# Altium PCB Review_2510_RegulationChauffage_Daugtherboard.PcbDoc
Units mm, origin at the board's own origin, x right, y up, seen from the top; angles counter-clockwise.
Board outline 100 x 60 mm, 2 copper layers (Top Layer, Bottom Layer), stack 1.586 mm thick; 59 components, 63 nets, 287 pads, 98 vias.
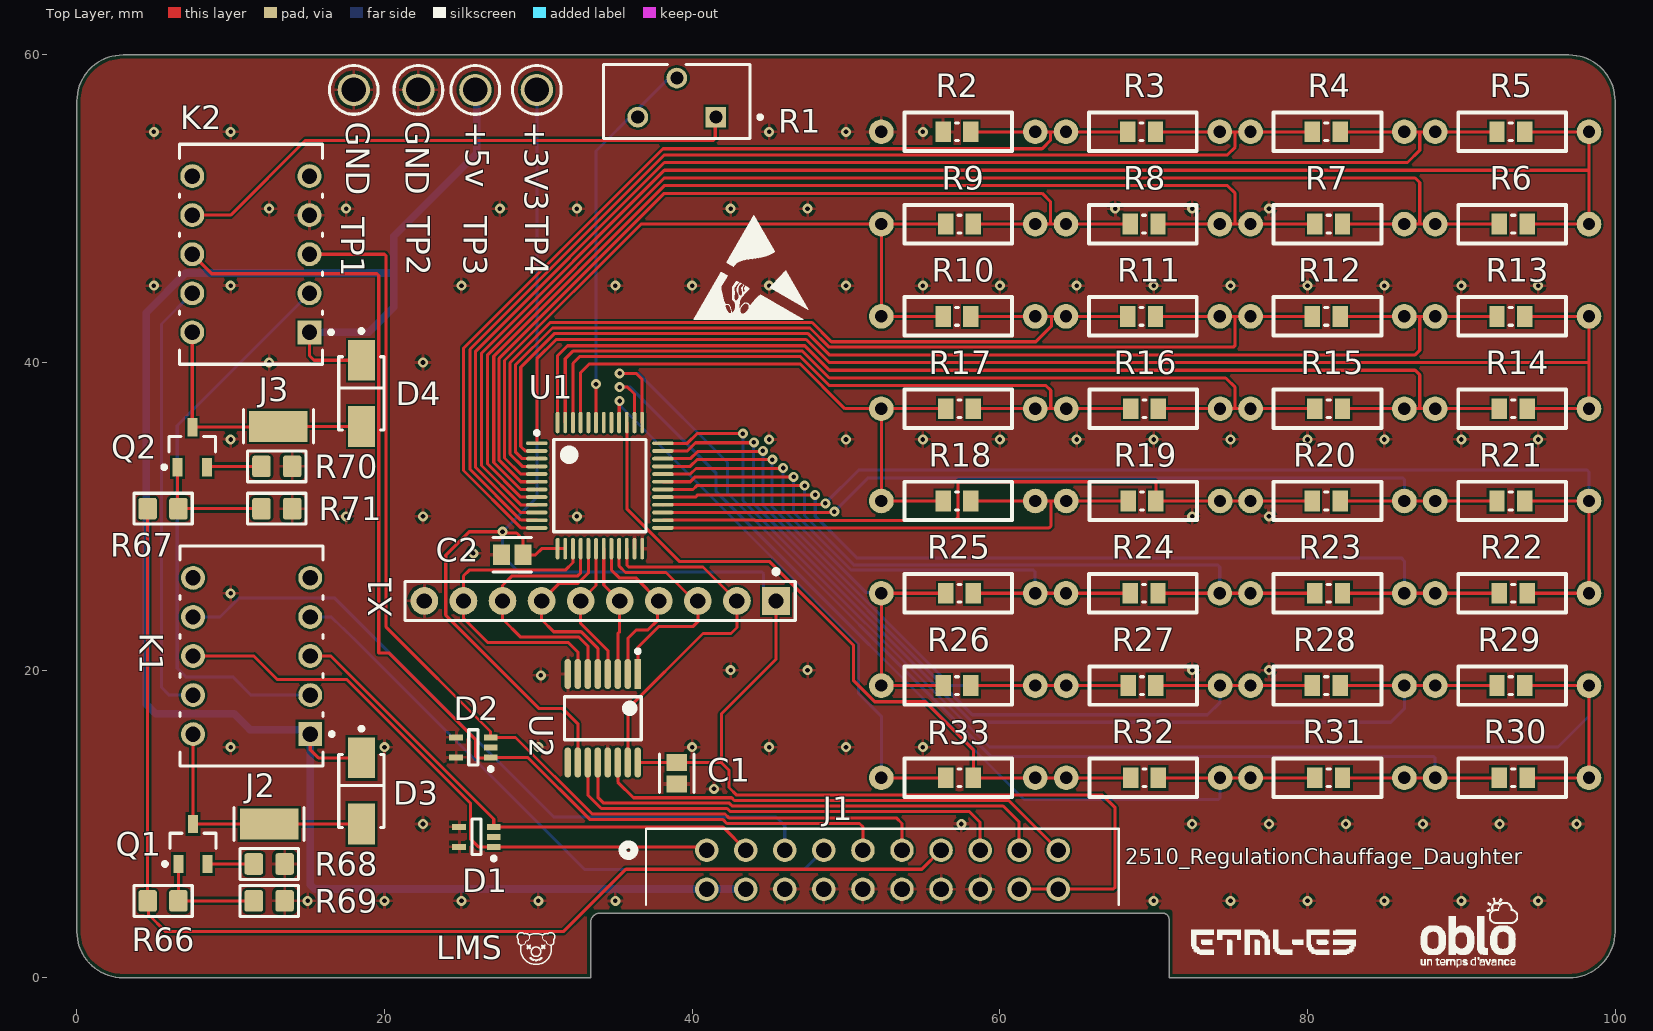
[diagram p0: Top Layer view]
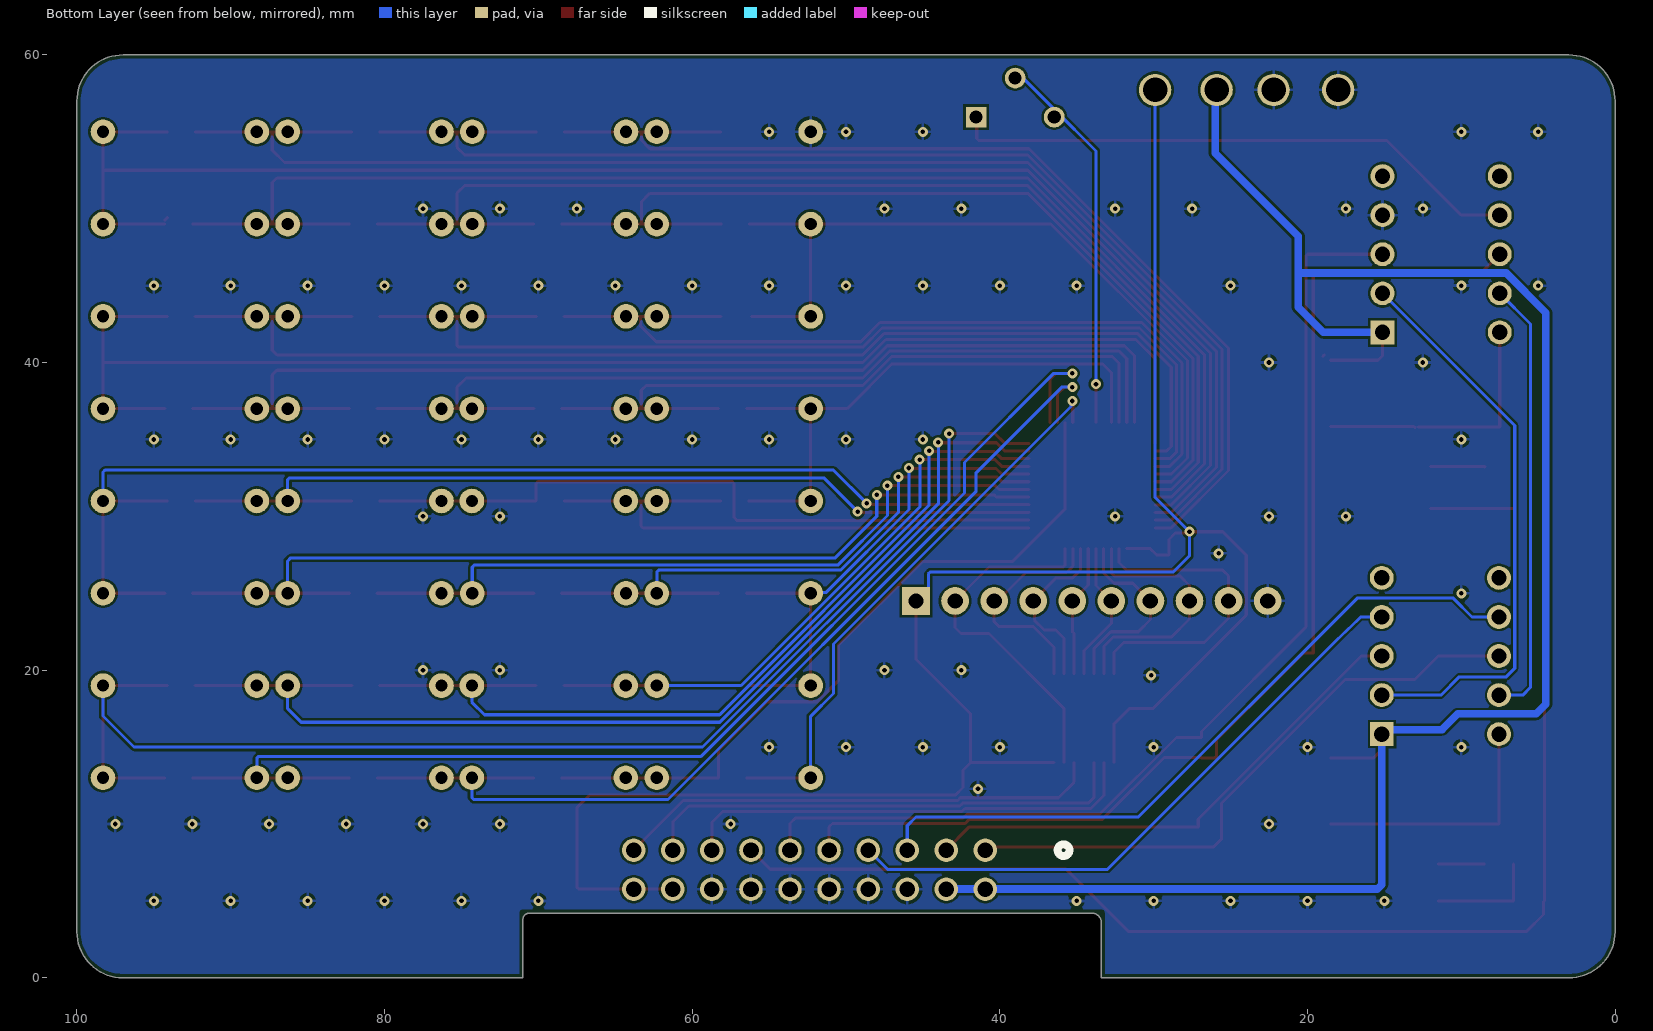
[diagram p1: Bottom Layer view, seen from below]

## Layer stack, top to bottom
Top Solder: solder mask 0.0102, Solder Resist, Dk 3.5
Top Layer: signal copper 0.018
Dielectric1: core 1.55, FR-4, Dk 4.8
Bottom Layer: signal copper 0.018
Bottom Solder: solder mask 0.0102, Solder Resist, Dk 3.5

## Board outline
3,0 cw(c3,3) 0,3 0,57 cw(c3,57) 3,60 97,60 cw(c97,57) 100,57 100,3 cw(c97,3) 97,0 71,0 71,3.8 ccw(c70.6,3.8) 70.6,4.2 34,4.2 ccw(c34,3.6) 33.4,3.6 33.4,0

## Design rules (kind name [scope] priority, off if disabled: settings)
BoardOutlineClearance [All] p1: gap=0.25 ignorepadtopadclearanceinfootprint=FALSE except(0: Arc-SplitContinuation Track-SplitContinuation SMDPad-SplitContinuation THPad-SplitContinuation Via-SplitContinuation Fill-SplitContinuation Poly-SplitContinuation Region-SplitContinuation Text-SplitContinuation)
Clearance Clearance-xPP-xTP-xTT [All] p1: gap=0.151 ignorepadtopadclearanceinfootprint=FALSE
ComponentClearance [All] p1: gap=0.25 collisioncheckmode=3 verticalgap=0.25 showdistances=FALSE
DiffPairsRouting [All] p1: maxlimit=0.25 minlimit=0.25 mostfreqgap=0.25 toplayer_minwidth=0.381 toplayer_maxwidth=0.381 toplayer_prefwidth=0.381 bottomlayer_minwidth=0.381 bottomlayer_maxwidth=0.381 bottomlayer_prefwidth=0.381 maxuncoupledlength=12.5
Height [All] p1: minheight=0 maxheight=25 prefheight=12.5
HoleSize HoleSize-PTH [All] p1: absolutevalues=TRUE maxlimit=10 minlimit=0.25 maxpercent=80.000 minpercent=20.000
HoleToHoleClearance [All] p1: gap=0.35 allowstackedmicrovias=TRUE
MinimumAnnularRing "Minimum IAR  >0.45mm" [((ObjectKind = 'Pad') OR (ObjectKind = 'Via')) And (Layer = 'MultiLayer') And (HoleDiameter > AsMM(0.45))] p1: minimumring=0.175 // minimum inner annular ring for pads > 0.45mm finished hole size
MinimumAnnularRing "Minimum IAR <=0.45mm" [((ObjectKind = 'Pad') OR (ObjectKind = 'Via')) And (Layer = 'MultiLayer') And (HoleDiameter <= AsMM(0.45))] p2: minimumring=0.175 // minimum inner annular ring for pads <= 0.45mm finished hole size
MinimumSolderMaskSliver [All] p1: minsoldermaskwidth=0.08
PasteMaskExpansion [All] p1: expansion=-0.025
PlaneClearance PlaneClearance-IPI [All] p1: clearance=0.25
PlaneConnect [All] p1: planeconnectstyle=Relief reliefexpansion=0.175 reliefentries=4 reliefconductorwidth=0.2 reliefairgap=0.2
PolygonConnect PolygonConnect-xTW [All] p1: connectstyle=Relief reliefconductorwidth=0.2 reliefentries=4 polygonreliefangle="90 Angle" airgapwidth=0.2
RoutingCorners [All] p1: cornerstyle=45-Degree minsetback=2.5 maxsetback=2.5
RoutingVias RoutingViasES [All] p1: holewidth=0.3 width=0.65 viastyle="Through Hole" minholewidth=0.25 minwidth=0.61 maxholewidth=0.45 maxwidth=0.8 // finishet hole size <= 0.45mm
SilkToSilkClearance [All] p1: silktosilkclearance=0.2
SilkToSolderMaskClearance SilkscreenOverComponentPads [IsPad] p1: minsilkscreentomaskgap=0.2 clearancetoexposedcopper=TRUE
SolderMaskExpansion [All] p1: expansion=0 istentingtop=FALSE
SupplyNets "Schematic Supply Nets_2" [InNet('GND')] p1: voltage=0.000
SupplyNets "Schematic Supply Nets_1" [InNet('+3V3')] p2: voltage=0.000
SupplyNets "Schematic Supply Nets" [InNet('+5V')] p3: voltage=0.000
UnRoutedNet [All] p1: checkbadconnections=TRUE
Width Width-xTW [All] p1: maxlimit=1.5 minlimit=0.15 preferedwidth=0.2
17 further rules are at their usual default settings.

## Components (designator, comment, footprint, x,y, rotation, side; value= is the part's Value field where it differs from the comment)
C1 "0.1 uF" FP-CC0805-0_85-IPC_C 39,13.299 r90 top
C2 "0.1 uF" FP-CC0805-0_85-IPC_C 28.299,27.5 r0 top
D1 "SP1002-02JTG" SOT65P220X110-5N 25.975,9.161 r180 top
D2 "SP1002-02JTG" SOT65P220X110-5N 25.775,14.977 r180 top
D3 "SS14" FP-403AE-MFG 18.5,12.15 r90 top
D4 "SS14" FP-403AE-MFG 18.5,38 r90 top
J1 "SFH11-PBPC-D10-RA-BK" CONN20_D10-RA-BK_SUL 40.94,8.3 r0 top
J2 "5019" FP-5019-MFG 12.5,10 r0 top
J3 "5019" FP-5019-MFG 13.1,35.85 r0 top
K1 "TQ2-5V-3" FP-TQ2-5V-3-MFG 11.36,20.92 r90 top
K2 "TQ2-5V-3" FP-TQ2-5V-3-MFG 11.31,47.04 r90 top
Q1 "IRLML2402" SOT95P237X112-3M 7.55,8.7 r90 top
Q2 "IRLML2402" SOT95P237X112-3M 7.5,34.5 r90 top
R1 "200R" BOUR-3386H 39,57.223 r180 top
R2 "820R" "THT SMD RESISTOR" 52.3,55 r0 top
R3 "6R2" "THT SMD RESISTOR" 64.3,55 r0 top
R4 "6R2" "THT SMD RESISTOR" 76.3,55 r0 top
R5 "6R8" "THT SMD RESISTOR" 88.3,55 r0 top
R6 "6R2" "THT SMD RESISTOR" 98.3,49 r180 top
R7 "6R8" "THT SMD RESISTOR" 86.3,49 r180 top
R8 "6R2" "THT SMD RESISTOR" 74.3,49 r180 top
R9 "6R8" "THT SMD RESISTOR" 62.3,49 r180 top
R10 "6R8" "THT SMD RESISTOR" 52.3,43 r0 top
R11 "6R2" "THT SMD RESISTOR" 64.3,43 r0 top
R12 "6R8" "THT SMD RESISTOR" 76.3,43 r0 top
R13 "6R8" "THT SMD RESISTOR" 88.3,43 r0 top
R14 "6R8" "THT SMD RESISTOR" 98.3,37 r180 top
R15 "6R2" "THT SMD RESISTOR" 86.3,37 r180 top
R16 "6R8" "THT SMD RESISTOR" 74.32,37 r180 top
R17 "6R8" "THT SMD RESISTOR" 62.3,37 r180 top
R18 "6R8" "THT SMD RESISTOR" 52.3,31 r0 top
R19 "6R8" "THT SMD RESISTOR" 64.32,31 r0 top
R20 "6R8" "THT SMD RESISTOR" 76.3,31 r0 top
R21 "6R8" "THT SMD RESISTOR" 88.3,31 r0 top
R22 "6R8" "THT SMD RESISTOR" 98.3,25 r180 top
R23 "6R8" "THT SMD RESISTOR" 86.3,25 r180 top
R24 "7R5" "THT SMD RESISTOR" 74.3,25 r180 top
R25 "6R8" "THT SMD RESISTOR" 62.3,25 r180 top
R26 "6R8" "THT SMD RESISTOR" 52.3,19 r0 top
R27 "6R8" "THT SMD RESISTOR" 64.32,19 r0 top
R28 "7R5" "THT SMD RESISTOR" 76.3,19 r0 top
R29 "6R8" "THT SMD RESISTOR" 88.3,19 r0 top
R30 "6R8" "THT SMD RESISTOR" 98.3,13 r180 top
R31 "7R5" "THT SMD RESISTOR" 86.3,13 r180 top
R32 "6R8" "THT SMD RESISTOR" 74.32,13 r180 top
R33 "7R5" "THT SMD RESISTOR" 62.3,13 r180 top
R66 "100R" RESC2012X06M 5.6,5 r0 top
R67 "100R" RESC2012X06M 5.6,30.5 r0 top
R68 "0R" RESC2012X06M 12.5,7.4 r180 top
R69 "100k" RESC2012X06M 12.5,5 r0 top
R70 "0R" RESC2012X06M 13,33.25 r180 top
R71 "100k" RESC2012X06M 13,30.5 r0 top
TP1 "5011" KSTN-5011_V 18,57.723 r180 top
TP2 "5011" KSTN-5011_V 22.2,57.723 r0 top
TP3 "5010" KSTN-5010_V 25.902,57.723 r0 top
TP4 "5010" KSTN-5010_V 29.9,57.723 r180 top
U1 "ADG732BSUZ-REEL" ADI-SU-48_L 34,32 r0 top
U2 "74HC595PW,118" FP-SOT403-1-IPC_A 34.19,16.875 r270 top
X1 "2.54" PIN-1X10-2.54 45.45,24.5 r180 top

## Footprints (in the part's own frame and the unit in brackets; to place one, negate y for a bottom-side part, rotate by r counter-clockwise, add the part's x,y. Pads: shape width x height; smd on the part's side, far side on the other; paste and mask are expansions set on the pad)
ADI-SU-48_L [mm] "QFP, 48-Leads, Body 7x7mm, Pitch 0.5mm, IPC High Density"
  oval 1.4x0.25 smd: 1(-4.1,2.75) 2(-4.1,2.25) 3(-4.1,1.75) 4(-4.1,1.25) 5(-4.1,0.75) 6(-4.1,0.25) 7(-4.1,-0.25) 8(-4.1,-0.75) 9(-4.1,-1.25) 10(-4.1,-1.75) 11(-4.1,-2.25) 12(-4.1,-2.75) 25(4.1,-2.75) 26(4.1,-2.25) 27(4.1,-1.75) 28(4.1,-1.25) 29(4.1,-0.75) 30(4.1,-0.25) 31(4.1,0.25) 32(4.1,0.75) 33(4.1,1.25) 34(4.1,1.75) 35(4.1,2.25) 36(4.1,2.75)
  oval 0.25x1.4 smd: 13(-2.75,-4.1) 14(-2.25,-4.1) 15(-1.75,-4.1) 16(-1.25,-4.1) 17(-0.75,-4.1) 18(-0.25,-4.1) 19(0.25,-4.1) 20(0.75,-4.1) 21(1.25,-4.1) 22(1.75,-4.1) 23(2.25,-4.1) 24(2.75,-4.1) 37(2.75,4.1) 38(2.25,4.1) 39(1.75,4.1) 40(1.25,4.1) 41(0.75,4.1) 42(0.25,4.1) 43(-0.25,4.1) 44(-0.75,4.1) 45(-1.25,4.1) 46(-1.75,4.1) 47(-2.25,4.1) 48(-2.75,4.1)
  silkscreen extent -4.22,-3 3,3.55, body extent -3.5,-3.5 3.5,3.5, height 1.2
BOUR-3386H [mm] "THD, 3-Leads, Body 9.53x4.83mm, Pitch 2.54mm"
  rect 1.35x1.35 hole 0.85: 1(-2.54,1.27)
  round 1.35 hole 0.85: 2(0,-1.27) 3(2.54,1.27)
  silkscreen extent -5.54,-2.16 4.76,2.67, body extent -4.79,-2.22 4.79,2.73, height 9.53
CONN20_D10-RA-BK_SUL [mil]
  round 60 hole 40 paste-99999 mask+0: 1(0,0) 2(0,-100) 3(100,0) 4(100,-100) 5(200,0) 6(200,-100) 7(300,0) 8(300,-100) 9(400,0) 10(400,-100) 11(500,0) 12(500,-100) 13(600,0) 14(600,-100) 15(700,0) 16(700,-100) 17(800,0) 18(800,-100) 19(900,0) 20(900,-100)
  silkscreen extent -215,-140 1055,55, body extent -150,-498 1044,8, height 281
FP-403AE-MFG [mm]
  rect 2.65x1.75 smd paste+0 mask+0: 1(-2.15,0) 2(2.15,0)
  silkscreen extent -2.37,-1.48 4.17,1.48, body extent -3.57,-1.58 3.57,1.58, height 0.25
FP-5019-MFG [mm]
  rect 3.8x2.03 smd paste+0 mask+0: 1(0,0)
  silkscreen extent -2.27,-1.08 2.27,1.08
FP-CC0805-0_85-IPC_C [mm]
  rect 1.105x1.356 smd paste+0 mask+0: 1(-0.701,0) 2(0.701,0)
  silkscreen extent -1.25,-1.12 1.25,1.12, body extent -1.35,-0.82 1.35,0.82, height 0.25
FP-SOT403-1-IPC_A [mm]
  rect 1.955x0.421 smd paste+0 mask+0: 1(-2.875,2.275)
  rrect100% 1.955x0.421 smd paste+0 mask+0: 2(-2.875,1.625) 3(-2.875,0.975) 4(-2.875,0.325) 5(-2.875,-0.325) 6(-2.875,-0.975) 7(-2.875,-1.625) 8(-2.875,-2.275) 9(2.875,-2.275) 10(2.875,-1.625) 11(2.875,-0.975) 12(2.875,-0.325) 13(2.875,0.325) 14(2.875,0.975) 15(2.875,1.625) 16(2.875,2.275)
  silkscreen extent -4.48,-2.5 1.4,2.5, body extent -4.35,-3 4.35,3, height 0.25
FP-TQ2-5V-3-MFG [mm]
  rect 1.55x1.55 hole 1 paste-2539.97 mask+0: 1(-5.08,-3.81)
  round 1.55 hole 1 paste-2539.97 mask+0: 2(-2.54,-3.81) 3(0,-3.81) 4(2.54,-3.81) 5(5.08,-3.81) 6(5.08,3.81) 7(2.54,3.81) 8(0,3.81) 9(-2.54,3.81) 10(-5.08,3.81)
  silkscreen extent -7.15,-5.34 7.15,4.65, body extent -7.25,-4.75 7.25,4.75, height 0.25
KSTN-5010_V [mm] "Test Point, Dia 3.17mm"
  round 2.1 hole 1.6: 1(0,0)
  silkscreen extent -1.59,-1.58 1.59,1.58, body extent -1.59,-1.59 1.59,1.59, height 8.13
KSTN-5011_V [mm] "Test Point, Dia 3.17mm"
  round 2.1 hole 1.6: 1(0,0)
  silkscreen extent -1.59,-1.58 1.59,1.58, body extent -1.59,-1.59 1.59,1.59, height 8.13
PIN-1X10-2.54 [mm] ".025 SQ Post Terminal Strip Assembly, 1x10 Pins, Vertical, 2.54mm Pitch, Male"
  rect 1.8x1.8 hole 1: 1(0,0)
  round 1.8 hole 1: 2(2.54,0) 3(5.08,0) 4(7.62,0) 5(10.16,0) 6(12.7,0) 7(15.24,0) 8(17.78,0) 9(20.32,0) 10(22.86,0)
  silkscreen extent -1.25,-2.05 24.13,1.27, body extent -1.27,-1.27 24.13,1.27, height 8.6
RESC2012X06M [mm] "Chip Resistor, 2-Leads, Body 2.00x1.25mm, IPC Low Density"
  rrect25% 1.2x1.4 smd: 1(-1,0) 2(1,0)
  silkscreen extent -1.9,-1 1.9,1, body extent -1.05,-0.63 1.05,0.63, height 0.6
SOT65P220X110-5N [mm] "SOT23, 5-Leads, Body 2.05x2.20mm, Pitch 0.65mm, IPC Medium Density"
  rect 0.9x0.4 smd: 1(-1.125,0.65) 2(-1.125,0) 3(-1.125,-0.65) 4(1.125,-0.65) 5(1.125,0.65)
  silkscreen extent -1.25,-1.15 0.3,1.52, body extent -1.2,-1.12 1.2,1.12, height 1.1
SOT95P237X112-3M [mm] "SOT23, 3-Leads, Body 2.92x2.37mm, Pitch 0.95mm, IPC Low Density"
  rect 1.2x0.65 smd: 1(-1.3,0.95) 2(-1.3,-0.95) 3(1.3,0)
  silkscreen extent -1.42,-1.5 0.7,1.95, body extent -1.32,-1.52 1.32,1.52, height 1.12
"THT SMD RESISTOR" [mm]
  round 1.6 hole 0.8: 1(0,0) 2(10,0)
  rect 1x1.35 smd: 1(4.02,0) 2(5.82,0)
  silkscreen extent 1.5,-1.25 8.5,1.25, body extent 3.87,-0.67 5.97,0.67, height 0.6

## Part data
C1 C2: library part "CAP CER 0.1 uF", "CAP CER 0.1 uF 10V X5R 0805"
D1 D2: "16V Pince 2 A (8/20µs) Ipp TVS - Diodes Montage en surface SC-70-5"
D3 D4: "DIODE SCHOTTKY 40V 1A SMA"
J1: "No Description Available"
K1 K2: library part CMP-05607-000142-1, "RELAY TELECOM DPDT 1A 5VDC"
R1: library part 3386H-1-201LF, "200 Ohms 0.5W, 1/2W PC Pins Through Hole Trimmer Potentiometer Cermet 1.0 Turn Side Adjustment"
R2: library part "RES 820 OHM 1% 1/8W 0805", "820 Ohms ±1% 0,125W, 1/8W Pavé résistif 0805 (2012 métrique) Couche épaisse - RC0805FR-13820RL"
R3 R4 R6 R8 R11 R15: library part "RES 6.2 OHM 1% 1/8W 0805_1", "RES 6.2 OHM 1% 1/8W 0805 RC0805FR-076R2L"
R5 R7 R9 R10 R12 R13 R14 R16 R17 R18 R19 R20 R21 R22 R23 R25 R26 R27 R29 R30 R32: library part "RES 6.8 OHM 1% 1/8W 0805", "RES 6.8 OHM 1% 1/8W 0805"
R24 R28 R31 R33: library part "RES SMD 7.5 OHM 1% 1/8W 0805", "RES SMD 7.5 OHM 1% 1/8W 0805 AC0805FR-077R5L"
R66 R67: library part CMP-066-000175-2, "RES 100ohm  ±1% 0.125W 2012 (0805 INCH)"
R68 R70: library part CMP-066-000150-2, "RES 0ohm  ±1% 0.125W 2012 (0805 INCH)"
R69 R71: library part CMP-066-000211-2, "RES 100kohm  ±1% 0.125W 2012 (0805 INCH)"
TP1 TP2: "Test Point, Black, Through Hole, RoHS, Bulk"
TP3 TP4: "Test Point, Red, Through Hole, RoHS, Bulk"
U1: "1.8 to 5.5 V / +/-2.5 V, 4 Ohm, 32-Channel Analog Multiplexer, -40 to 85 degC, 48-pin QFP (SU-48), Reel"
U2: "IC SHIFT REGISTER 8BIT 16TSSOP"
X1: library part CMP-055-000013-1, "PIN HEADER 2.54 1x10"

## Via types
v1: diameter 0.65, hole 0.3, Top Layer to Bottom Layer, 98 vias

## Nets (pads, with @x,y where several pads share a name; then routed paths per layer and width w, separated by ;. In a path a pad name is that pad's centre, name@x,y a point inside that pad or via, vN(x,y) a via of type N, cw(c..) or ccw(c..) an arc to the next point about the centre after c; other vN are vias at no path point)
+3V3: C1.2 C2.2 J1.18 J1.20 TP4.1 U1.13 U1.14 U2.10 U2.16 X1.1 | length 135.5
  Top Layer w0.2: U1.14 30.22,27.9 29.82,27.5 C2.2 29,28.5 28.586,28.914 27.756,28.914 v1(27.67,29) 25.5,29 23.979,27.479 23.979,23.574 30.053,17.5 31.583,17.5 32.565,16.518 U2.10 ; U2.16 C1.2 41.897,14 ; X1.1 45.45,20.7 41.897,17.147 41.897,14 ; J1.18@61.26,5.769 63.8,5.769 67.383,5.769 67.5,5.886 67.5,11.058 66.681,11.877 42.89,11.877 42.394,12.374 42.394,13.503 41.897,14
  Bottom Layer w0.2: TP4.1@29.9,58.419 29.9,31.23 v1(27.67,29) 27.67,27.43 28.717,26.383 44.533,26.383 44.65,26.266 44.65,25.3 X1.1
+5V: D3.2 D4.2 J1.2 J1.4 K1.1 K2.1 TP3.1 | length 124.8
  Top Layer w0.2: K2.1 15.12,40.45 15.42,40.15 D4.2 ; K1.1 15.17,14.826 15.696,14.3 D3.2 ; D4.2@18.9,40.5 D4.2@19,40.4
  Bottom Layer w0.5: K2.1 18.967,41.96 20.6,43.593 20.6,45.819 ; TP3.1@26,58 26,53.605 20.6,48.205 20.6,45.819 ; J1.4@43.48,5.769 15.463,5.769 15.17,6.062 K1.1 14.645,16.133 11.26,16.133 10.234,17.159 5.134,17.159 4.5,17.793 4.5,43.244 7.075,45.819 20.6,45.819
A0: U1.15 U2.7 X1.9 | length 20.9
  Top Layer w0.2: U1.15 32.25,27 31.75,26.5 25.5,26.5 25.13,26.13 X1.9 25.13,23.37 26.702,21.798 31.952,21.798 32.565,21.185 U2.7
A1: U1.16 U2.6 X1.8 | length 17.3
  Top Layer w0.2: U1.16 32.75,26.315 32.565,26.13 28.3,26.13 27.67,25.5 X1.8 27.67,23.33 28.851,22.149 32.64,22.149 33.215,21.574 U2.6
A2: U1.17 U2.5 X1.7 | length 12.7
  Top Layer w0.2: U1.17 33.25,26.319 32.582,25.651 31.361,25.651 X1.7 30.21,23.29 31,22.5 32.785,22.5 33.865,21.42 U2.5
A3: U1.18 U2.4 X1.6 | length 9.3
  Top Layer w0.2: U1.18 33.75,25.5 X1.6 32.75,23.039 34.515,21.274 U2.4
A4: U1.19 U2.3 X1.5 | length 8.6
  Top Layer w0.2: U1.19 34.25,25.54 X1.5 35.282,24.492 35.282,22.5 35.165,22.383 U2.3
ADC_IN+: J1.5 K1.7 | length 46.7
  Bottom Layer w0.2: K1.7 9.3,23.46 10.522,24.682 16.774,24.682 31,10.456 45.45,10.456 46.02,9.886 J1.5@46.02,8.309
ADC_IN-: J1.7 K1.4 | length 40.7
  Bottom Layer w0.2: K1.4 16.54,23.46 17.956,22.088 33.006,7.038 47.289,7.038 J1.7@48.56,8.309
BOILER_IN+: D2.1 J1.9 K2.8 | length 75.5
  Top Layer w0.2: K2.8 8.769,45.771 19.509,45.771 19.626,45.654 19.626,21.126 20.276,21.126 25.902,15.5 25.902,14.417 26.019,14.3 26.874,14.3 D2.1 29.308,14.327 33.334,10.301 41.984,10.301 42.257,10.029 50.883,10.029 51.1,9.811 J1.9@51.1,8.309
BOILER_IN-: D2.3 J1.11 K2.3 | length 69.9
  Top Layer w0.2: K2.3 19.988,47.04 20.106,46.923 20.106,22.795 26.891,16.01 26.891,15.636 D2.3 28.52,15.627 33.494,10.652 42.13,10.652 42.385,10.396 53.272,10.396 53.64,10.029 J1.11@53.64,8.309
BYPASS_OUT+: K1.9 K2.9 | length 28.7
  Bottom Layer w0.2: K2.9 5.5,42.5 5.5,18.88 6,18.38 K1.9
BYPASS_OUT-: K1.2 K2.2 | length 37.3
  Bottom Layer w0.2: K2.2 6.524,35.904 6.524,20.12 7.077,19.567 10.133,19.567 11.32,18.38 K1.2
C\S\: U1.20 U2.2 X1.4 | length 11.3
  Top Layer w0.2: U1.20 34.75,26.504 35.254,26 36.33,26 X1.4 37.756,24.426 37.756,23.256 37.1,22.6 36.35,22.6 35.815,22.065 U2.2
CMD_RELAY: J1.13 R66.1 R67.1 | length 80.6
  Top Layer w0.2: R67.1 R66.1 4.65,4.95 4.65,4.117 5.767,3 31.626,3 35.686,7.06 54.931,7.06 J1.13@56.18,8.309
E\N\: U1.22 U2.15 X1.2 | length 23.7
  Top Layer w0.2: U1.22 35.76,27.89 35.76,26.819 35.877,26.702 40.708,26.702 X1.2 42.91,22.77 42.523,22.383 40.698,22.383 35.815,17.5 U2.15
GND: C1.1 C2.1 D1.4 D1.5 D2.4 D2.5 J1.6 J1.8 J1.10 J1.12 J1.14 J1.16 K2.4 R2.1 R68.1 R69.2 R70.1 R71.2 TP1.1 TP2.1 U1.23 U1.24 U2.8 U2.13 X1.10
  other v1: 15,5 20,5 25,5 30,5 35,5 70,5 75,5 80,5 85,5 90,5 95,5 22.5,10 57.5,10 72.5,10 77.5,10 82.5,10 87.5,10 92.5,10 97.5,10 41.421,12.281 10,15 20,15 30,15 40,15 45,15 50,15 55,15 30.156,19.662 42.5,20 47.5,20 72.5,20 77.5,20 10,25 25.775,27.6 17.5,30 22.5,30 32.5,30 72.5,30 77.5,30 10,35 45,35 50,35 55,35 60,35 65,35 70,35 75,35 80,35 85,35 90,35 95,35 12.5,40 22.5,40 5,45 10,45 25,45 35,45 40,45 45,45 50,45 55,45 60,45 65,45 70,45 75,45 80,45 85,45 90,45 95,45 12.5,50 17.5,50 27.5,50 32.5,50 42.5,50 47.5,50 67.5,50 72.5,50 77.5,50 5,55 10,55 45,55 50,55 55,55
N1: R2.2 R3.1 U1.12 | length 68.8
  Top Layer w0.2: U1.12 28.865,29.25 25.13,32.985 25.13,40.93 38.1,53.9 62.756,53.9 63.3,54.444 63.3,55 ; R2.2@58.12,55 62.3,55 63.3,55 ; R3.1@68.32,55 64.3,55 63.3,55
N2: R3.2 R4.1 U1.11 | length 79.9
  Top Layer w0.2: U1.11 28.861,29.75 25.551,33.06 25.551,40.855 38.196,53.5 74.8,53.5 75.3,54 75.3,55 ; R3.2@70.12,55 74.3,55 75.3,55 ; R4.1@80.32,55 76.3,55 75.3,55
N3: R4.2 R5.1 U1.10 | length 90.9
  Top Layer w0.2: U1.10 28.857,30.25 25.902,33.205 25.902,40.709 38.193,53 86.5,53 87.3,53.8 87.3,55 ; R4.2@82.12,55 86.3,55 87.3,55 ; R5.1@92.32,55 88.3,55 87.3,55
N4: R5.2 R6.1 U1.9 | length 103.3
  Top Layer w0.2: U1.9@29.9,30.75 28.854,30.75 26.3,33.304 26.3,40.611 38.189,52.5 98.3,52.5 ; R6.1@94.12,49.41 R6.1@94.28,49.25 ; R5.2@94.12,55 98.3,55 98.3,52.5 ; R6.1@94.28,49 98.3,49 98.3,51.5 98.3,52.5
N5: R6.2 R7.1 U1.8 | length 89.6
  Top Layer w0.2: U1.8 28.85,31.25 26.7,33.4 26.7,40.514 38.186,52 87,52 87.3,51.7 87.3,49 ; R7.1@82.28,49 86.3,49 87.3,49 ; R6.2@92.48,49 88.3,49 87.3,49
N6: R7.2 R8.1 U1.7 | length 75.6
  Top Layer w0.2: U1.7 28.847,31.75 27.1,33.497 27.1,40.418 38.182,51.5 74.8,51.5 75.3,51 75.3,49 ; R8.1@70.28,49 74.3,49 75.3,49 ; R7.2@80.48,49 76.3,49 75.3,49
N7: R8.2 R9.1 U1.6 | length 62
  Top Layer w0.2: U1.6 28.85,32.25 27.451,33.649 27.451,40.273 38.178,51 62.756,51 63.3,50.456 63.3,49 ; R9.1@58.1,49 58.28,49 62.3,49 63.3,49 ; R8.2@68.48,49 64.3,49 63.3,49
N8: R9.2 R10.1 U1.5 | length 50.9
  Top Layer w0.2: U1.5 28.85,32.75 27.802,33.798 27.802,40.127 36.675,49 R9.2@52.3,49 ; R10.1@56.14,43 52.3,43 R9.2@52.3,49 ; R9.2@56.3,49 R9.2@52.3,49
N9: R10.2 R11.1 U1.4 | length 56.1
  Top Layer w0.2: U1.4 28.95,33.25 28.153,34.047 28.153,39.982 30.771,42.6 47.8,42.6 49.049,41.351 62.337,41.351 63.367,42.381 63.367,43 ; R10.2@58.12,43 62.3,43 63.367,43 ; R11.1@68.32,43 64.3,43 63.367,43
N10: R11.2 R12.1 U1.3 | length 67.7
  Top Layer w0.2: U1.3 28.95,33.75 28.504,34.196 28.504,39.837 30.916,42.249 47.655,42.249 48.904,41 75.183,41 75.3,41.117 75.3,43 ; R11.2@70.12,43 74.3,43 75.3,43 ; R12.1@80.32,43 76.3,43 75.3,43
N11: R12.2 R13.1 U1.2 | length 78.8
  Top Layer w0.2: U1.2 29.89,34.26 29.14,34.26 28.855,34.545 28.855,39.691 31.062,41.898 47.509,41.898 48.907,40.5 87,40.5 87.3,40.8 87.3,43 ; R12.2@82.12,43 86.3,43 87.3,43 ; R13.1@92.32,43 88.3,43 87.3,43
N12: R13.2 R14.1 U1.1 | length 89.2
  Top Layer w0.2: U1.1 29.9,40.24 31.16,41.5 47.411,41.5 48.911,40 50,40 98.3,40 ; R13.2@94.12,43 98.3,43 98.3,40 ; R14.1@94.28,37 98.3,37 98.3,40
N13: R14.2 R15.1 U1.48 | length 73.9
  Top Layer w0.2: U1.48 31.25,40.45 31.893,41.093 47.321,41.093 48.914,39.5 87,39.5 87.3,39.2 87.3,37 ; R15.1@82.28,37 86.3,37 87.3,37 ; R14.2@92.48,37 88.3,37 87.3,37
N14: R15.2 R16.1 U1.47 | length 60.4
  Top Layer w0.2: U1.47 31.75,40.25 32.242,40.742 47.176,40.742 48.918,39 74.683,39 75.3,38.383 75.3,37 ; R16.1@70.3,37 74.32,37 75.3,37 ; R15.2@80.48,37 76.3,37 75.3,37
N15: R16.2 R17.1 U1.46 | length 47.4
  Top Layer w0.2: U1.46 32.25,39.95 32.691,40.391 47.03,40.391 48.922,38.5 63,38.5 63.31,38.19 63.31,37 ; R17.1@58.28,37 62.3,37 63.31,37 ; R16.2@68.5,37 64.32,37 63.31,37
N16: R17.2 R18.1 U1.45 | length 38.4
  Top Layer w0.2: U1.45 32.75,39.35 33.3,39.9 47.025,39.9 49.925,37 R17.2@52.3,37 ; R18.1@56.32,31 52.3,31 R17.2@52.3,37 ; R17.2@56.48,37 R17.2@52.3,37
N17: R18.2 R19.1 U1.25 | length 37.1
  Top Layer w0.2: U1.25 63.208,29.25 63.325,29.367 63.325,31 ; R18.2@58.12,31 62.3,31 63.325,31 ; R19.1@68.34,31 64.32,31 63.325,31
N18: R19.2 R20.1 U1.26 | length 45.8
  Top Layer w0.2: U1.26 44.077,29.75 44.103,29.724 57.07,29.724 57.28,29.934 57.28,32.133 57.397,32.25 70.03,32.25 70.147,32.133 70.147,31.007 70.14,31 74.32,31 76.3,31 R20.1@80.32,31
N19: R20.2 R21.1 U1.27 | length 60.8
  Top Layer w0.2: U1.27 38.11,30.26 49.203,30.26 v1(49.243,30.3) ; R20.2@82.12,31 86.3,31 88.3,31 R21.1@92.32,31
  Bottom Layer w0.2: v1(49.243,30.3) 51.443,32.5 86.183,32.5 86.3,32.383 R20.2@86.3,31
N20: R21.2 R22.1 U1.28 | length 77.3
  Top Layer w0.2: U1.28@38.1,30.75 38.11,30.76 48.571,30.76 v1(48.654,30.843) ; R21.2@94.12,31 98.3,31 98.3,25 R22.1@94.28,25
  Bottom Layer w0.2: v1(48.654,30.843) 50.811,33 98.183,33 98.3,32.883 R21.2@98.3,31
N21: R22.2 R23.1 U1.29 | length 63.2
  Top Layer w0.2: U1.29 40.213,31.25 40.362,31.399 43.911,31.399 43.912,31.4 v1(48,31.4) ; R23.1@82.28,25 86.3,25 88.3,25 R22.2@92.48,25
  Bottom Layer w0.2: v1(48,31.4) 48,30 50.7,27.3 86.1,27.3 86.3,27.1 R23.1@86.3,25
N22: R23.2 R24.1 U1.30 | length 51.5
  Top Layer w0.2: U1.30 40.049,31.75 40.293,31.994 v1(47.312,31.994) ; R24.1@70.28,25 74.3,25 76.3,25 R23.2@80.48,25
  Bottom Layer w0.2: v1(47.312,31.994) 47.3,31.982 47.3,30.052 50.501,26.851 74.149,26.851 74.3,26.7 R24.1@74.3,25
N23: R24.2 R25.1 U1.31 | length 39.8
  Top Layer w0.2: U1.31 39.881,32.25 40.201,32.57 v1(46.599,32.57) ; R25.1@58.28,25 62.3,25 64.3,25 R24.2@68.48,25
  Bottom Layer w0.2: v1(46.599,32.57) 46.599,30.256 50.356,26.5 62.183,26.5 62.3,26.383 R25.1@62.3,25
N24: R25.2 R26.1 U1.32 | length 33.5
  Top Layer w0.2: U1.32 39.885,32.75 40.246,33.111 45.875,33.111 v1(45.91,33.146) ; R26.1@56.32,19 52.3,19 52.3,25 R25.2@56.48,25
  Bottom Layer w0.2: v1(45.91,33.146) 45.91,30.45 51.317,25.042 52.258,25.042 R25.2@52.3,25
N25: R26.2 R27.1 U1.33 | length 42.5
  Top Layer w0.2: U1.33 39.881,33.25 40.318,33.687 v1(45.215,33.687) ; R26.2@58.12,19 62.3,19 64.32,19 R27.1@68.34,19
  Bottom Layer w0.2: v1(45.215,33.687) 45.2,33.672 45.2,30.614 56.814,19 R26.2@62.3,19
N26: R27.2 R28.1 U1.34 | length 57.2
  Top Layer w0.2: U1.34 39.885,33.75 40.343,34.208 44.545,34.208 v1(44.6,34.263) ; R27.2@70.14,19 74.32,19 76.3,19 R28.1@80.32,19
  Bottom Layer w0.2: v1(44.6,34.263) 44.6,30.717 58.217,17.1 73.5,17.1 74.32,17.92 R27.2@74.32,19
N27: R28.2 R29.1 U1.35 | length 70.4
  Top Layer w0.2: U1.35 39.678,34.25 40.213,34.784 43.989,34.784 v1(44.012,34.807) ; R28.2@82.12,19 86.3,19 88.3,19 R29.1@92.32,19
  Bottom Layer w0.2: v1(44.012,34.807) 44,34.795 44,30.821 58.204,16.617 85.417,16.617 86.3,17.5 R28.2@86.3,19
N28: R29.2 R30.1 U1.36 | length 88.5
  Top Layer w0.2: U1.36 39.682,34.75 40.308,35.376 v1(43.3,35.376) ; R29.2@94.12,19 98.3,19 98.3,13 R30.1@94.28,13
  Bottom Layer w0.2: v1(43.3,35.376) 43.3,31.024 59.324,15 96.283,15 98.3,17.017 R29.2@98.3,19
N29: R30.2 R31.1 U1.37 | length 80.4
  Top Layer w0.2: v1(35.29,39.3) 36.343,39.3 36.75,38.893 U1.37 ; R31.1@82.28,13 86.3,13 88.3,13 R30.2@92.48,13
  Bottom Layer w0.2: v1(35.29,39.3) 36.5,39.3 42.3,33.5 42.3,31.514 59.413,14.4 88.183,14.4 88.3,14.283 R30.2@88.3,13
N30: R31.2 R32.1 U1.38 | length 65.4
  Top Layer w0.2: v1(35.29,38.4) 35.303,38.413 35.787,38.413 36.25,37.95 U1.38 ; R32.1@70.3,13 74.32,13 76.3,13 R31.2@80.48,13
  Bottom Layer w0.2: v1(35.29,38.4) 35.976,38.4 41.54,32.836 41.54,31.626 61.568,11.598 74.198,11.598 74.32,11.72 R32.1@74.32,13
N31: R32.2 R33.1 U1.39 | length 48
  Top Layer w0.2: U1.39 35.75,30.493 39.19,27.053 45.052,27.053 50.5,21.605 50.5,19.314 51.865,17.949 55.151,17.949 58.28,14.82 58.28,13 62.3,13 64.32,13 R32.2@68.5,13
N32: R33.2 U1.40 | length 37.1
  Top Layer w0.2: U1.40 35.26,36.11 35.26,37.47 v1(35.29,37.5) ; R33.2@52.3,13 R33.2@56.48,13
  Bottom Layer w0.2: v1(35.29,37.5) 35.376,37.414 35.376,37.139 50.811,21.704 50.811,18.489 52.3,17 R33.2@52.3,13
NetD3_1: D3.1 J2.1 K1.10 Q1.3 | length 16.8
  Top Layer w0.2: K1.10 Q1.3 D3.1
NetD4_1: D4.1 J3.1 K2.10 Q2.3 | length 17
  Top Layer w0.2: K2.10 Q2.3 J3.1@12.8,35.8 ; J3.1@13,35.75 J3.1 D4.1
NetQ1_1: Q1.1 R66.2 R69.1 | length 7.3
  Top Layer w0.2: Q1.1 R66.2 R69.1
NetQ1_2: Q1.2 R68.2 | length 3
  Top Layer w0.2: Q1.2 R68.2
NetQ2_1: Q2.1 R67.2 R71.1 | length 8.2
  Top Layer w0.2: R67.2@6.55,30.5 R71.1 ; Q2.1 6.55,30.55 R67.2
NetQ2_2: Q2.2 R70.2 | length 3.6
  Top Layer w0.2: Q2.2 8.5,33.25 R70.2
NetR1_2: R1.2 R1.3 U1.43 | length 25.1
  Top Layer w0.2: U1.43 v1(33.75,38.6)
  Bottom Layer w0.2: v1(33.75,38.6) 33.75,53.75 36.46,56.46 R1.2@39,59
SENSOR_IN+: D1.1 J1.1 K1.8 | length 40
  Top Layer w0.2: K1.8 11.5,20.92 13.014,19.406 17.525,19.406 25.598,11.333 25.598,9.011 26.098,8.511 40.738,8.511 J1.1@40.94,8.309
SENSOR_IN-: D1.3 J1.3 K1.3 | length 33.8
  Top Layer w0.2: K1.3 16.508,20.92 27.1,10.328 D1.3 41.978,9.811 J1.3@43.48,8.309
SHIFT_CLK: J1.15 U2.11 | length 30.1
  Top Layer w0.2: U2.11 33.215,11.885 34.097,11.003 42.275,11.003 42.454,10.824 57.993,10.824 58.72,10.097 J1.15@58.72,8.309
SHIFT_DATA: J1.19 U2.14 | length 31.7
  Top Layer w0.2: U2.14 35.165,12.722 36.182,11.705 42.566,11.705 42.745,11.526 60.583,11.526 J1.19@63.8,8.309
SHIFT_LATCH: J1.17 U2.12 | length 32.1
  Top Layer w0.2: U2.12 33.865,11.731 34.242,11.354 42.421,11.354 42.6,11.175 60.215,11.175 61.26,10.13 J1.17@61.26,8.309
SIMU_OUT+: K2.7 R1.1 | length 38
  Top Layer w0.2: K2.7 10,49.58 14.864,54.444 41.383,54.444 41.5,54.562 41.5,56.42 R1.1@41.54,56.46
W\R\: U1.21 U2.1 X1.3 | length 14.9
  Top Layer w0.2: U1.21 35.25,26.762 35.661,26.351 38.3,26.351 40.151,24.5 X1.3 40.37,23.144 40.077,22.851 37.847,22.851 36.465,21.469 U2.1
pads on no net: D1.2 D2.2 K1.5 K1.6 K2.5 K2.6 U1.41 U1.42 U1.44 U2.9

## Polygon pours and split planes (outlines as drawn)
GND on Top Layer "GND_L01_P000" (solid, remove dead copper, pour order 0): 0,0 0,60 100,60 100,0
GND on Bottom Layer "GND_L02_P001" (solid, remove dead copper, pour order 1): 0,0 0,60 100,60 100,0

## Silkscreen, mask and mechanical layers (free items; w line width, h text height)
Top Overlay:
  drawing of 44 lines, arcs and shapes, not listed
  text "GND" at 21.379,55.693 h1.52 r270
  text "+5v" at 25.279,55.693 h1.52 r270
  text "+3V3" at 29.109,55.699 h1.52 r270
  text "GND" at 17.504,55.663 h1.52 r270
  text "2510_RegulationChauffage_Daughter" at 68.154,7.387 h1
  text "LMS" at 23.354,1.204 h1.52
Outline:
  lines w0.254: 97,0 ccw(c97,3) 100,3 100,57 ccw(c97,57) 97,60 ; 97,0 71,0 71,3.8 ccw(c70.6,3.8) 70.6,4.2 34,4.2 ccw(c34,3.6) 33.4,3.6 33.4,0 3,0 cw(c3,3) 0,3 0,57 cw(c3,57) 3,60 97,60 ; 97,0 97,0 ; 97,60 97,60

## Text inside footprints (layer, text, board x,y; h text height)
J1: Top 3D Body "RefDes2" at 50.147,6.395 h1.27